# Allegro board Tesis_minimum_size_v2.brd
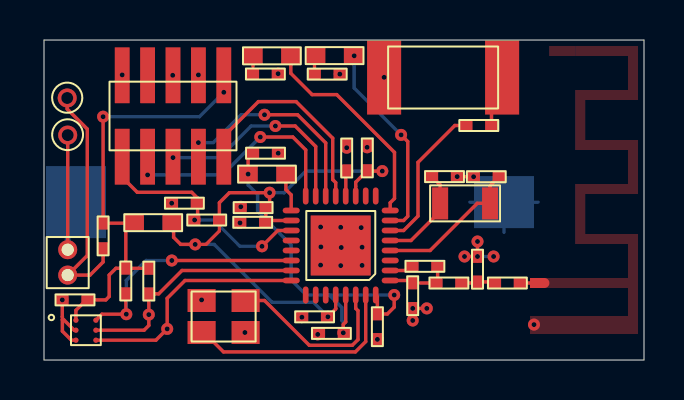
[diagram p0: board, top side]
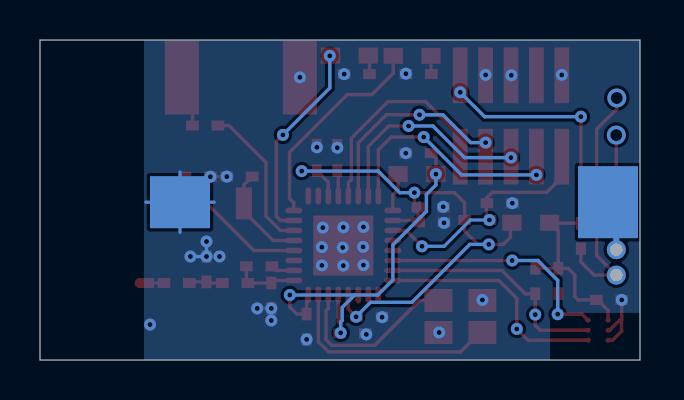
[diagram p1: board, bottom side, seen from below]

Outline 30 x 16 mm; copper layers: TOP, BOTTOM. Coordinates in mm from the lower left corner of the outline.
Outline path: 0,16 0,0 30,0 30,16 0,16

## Design rules (mm)
constraint set DEFAULT: min track width 0.16, pair gap 0.16

## Placement (name value [footprint] x y rotation side)
A1  Anteena  [AN043_FLIP]  24.8 0.8 270 top
C3  12 pF  [MF_0402_SMD_CAPACITOR]  22.12 9.17 0 top
C4  12 pF  [MF_0402_SMD_CAPACITOR]  20.02 9.17 180 top
C5  1.2 pF  [MF_0402_SMD_CAPACITOR]  18.43 3.21 90 top
C6  1.2 pF  [MF_0402_SMD_CAPACITOR]  21.68 4.54 270 top
C7  12 pF  [MF_0402_SMD_CAPACITOR]  23.17 3.85 180 top
C8  100 nF  [MF_0402_SMD_CAPACITOR]  15.13 10.1 270 top
C9  10 uF  [MF_0402_SMD_CAPACITOR]  11.07 10.34 180 top
C10  100 nF  [MF_0402_SMD_CAPACITOR]  14.37 1.33 0 top
C11  100 nF  [MF_0402_SMD_CAPACITOR]  16.67 1.67 90 top
C13  100 nF  [MF_0402_SMD_CAPACITOR]  7.02 7.84 0 top
C17  100 nF  [MF_0402_SMD_CAPACITOR]  16.16 10.11 270 top
C18  100 nF  [MF_0402_SMD_CAPACITOR]  13.53 2.16 0 top
C19  10 uF  [MF_0402_SMD_CAPACITOR]  10.44 6.89 0 top
C20  100 nF  [MF_0402_SMD_CAPACITOR]  10.46 7.62 0 top
C21  100 nF  [MF_0402_SMD_CAPACITOR]  1.55 3.01 0 top
CON1  -  [FTSH-105-01-F-DV]  6.45 12.2 0 top
CON2  -  [M50-3530242]  1.19 4.88 270 top
FL1  BLM18HE152SN1  [MF_0603_SMD_FILTER]  5.46 6.87 0 top
L1  2 nH  [MF_0402_SMD_INDUCTOR]  20.25 3.85 0 top
L2  15 nH  [MF_0402_SMD_INDUCTOR]  19.05 4.69 0 top
L3  10 uH  [MF_0603_SMD_INDUCTOR]  11.15 9.3 180 top
LED1  green led  [MF_0603_SMD_LED]  11.39 15.21 180 top
LED2  red led  [MF_0603_SMD_LED]  14.53 15.22 180 top
R1  100 k  [MF_0402_SMD_RESISTOR]  8.13 7 0 top
R3  10 k  [MF_0402_SMD_RESISTOR]  4.09 3.95 90 top
R4  10 k  [MF_0402_SMD_RESISTOR]  5.24 3.95 90 top
R5  0  [MF_0402_SMD_RESISTOR]  2.96 6.21 90 top
R6  680  [MF_0402_SMD_RESISTOR]  11.07 14.3 0 top
R7  150  [MF_0402_SMD_RESISTOR]  14.16 14.3 0 top
R9  270  [MF_0402_SMD_RESISTOR]  21.74 11.73 0 top
SW2  -  [KSS341GLFS]  19.95 14.12 180 top
U1  CC2650  [SMD_CC2650_32]  14.84 5.73 90 top
U6  -  [HDC2010]  2.1 1.49 0 top
U7  -  [S8421-45R]  14.5 7.89 90 bottom
Y1  32.768kHz  [C-135R]  21.05 7.83 180 top
Y2  24 MHZ  [TSX-3225_24MHZ]  8.98 2.18 0 top

## Library data of the parts
A1 = Anteena
C3-C11 C13 C17-C21 = Capacitor
CON1 = FTSH-105-01-F-DV
CON2 = M50-3530242
FL1 = BLM18HE152SN1
L1-L3 = Inductor
LED1 LED2 = led
R1 R3-R7 R9 = Resistor
SW2 = SwitchButton
U1 = CC2650
U6 = HDC2010
U7 = S8421-45R
Y1 = FC-135R
Y2 = TXS-3225

## Footprints (pads in the part's own frame, mm; a bottom-side part is the same pattern mirrored in y, then rotated)
AN043_FLIP
  rect 0.5x0.5 smd: 1(-3.05,-0.25)
C-135R
  rect 0.8x1.6 smd: 1(-1.25,0) 2(1.25,0)
FTSH-105-01-F-DV
  rect 0.74x2.79 smd: 1(-2.54,2.035) 2(-1.27,2.035) 3(0,2.035) 4(1.27,2.035) 5(2.54,2.035) 6(-2.54,-2.035) 7(-1.27,-2.035) 8(0,-2.035) 9(1.27,-2.035) 10(2.54,-2.035)
HDC2010
  round 0.263 smd: 1(-0.5,0.5) 2(0.5,0.5) 3(-0.5,0) 4(0.5,0) 5(-0.5,-0.5) 6(0.5,-0.5)
KSS341GLFS
  rect 1.7x3.7 smd: 1(-2.95,0) 2(2.95,0)
M50-3530242
  round 0.95 hole 0.6: 1(-0.635,0) 2(0.635,0)
MF_0402_SMD_CAPACITOR
  rect 0.635x0.5 smd: 1(-0.635,0) 2(0.635,0)
MF_0402_SMD_INDUCTOR
  rect 0.635x0.5 smd: 1(-0.635,0) 2(0.635,0)
MF_0402_SMD_RESISTOR
  rect 0.635x0.5 smd: 1(-0.635,0) 2(0.635,0)
MF_0603_SMD_FILTER
  rect 0.965x0.8 smd: 1(-0.945,0) 2(0.945,0)
MF_0603_SMD_INDUCTOR
  rect 0.965x0.8 smd: 1(-0.945,0) 2(0.945,0)
MF_0603_SMD_LED
  rect 0.965x0.8 smd: 1(-0.945,0) 2(0.945,0)
S8421-45R
  rect 2.6x3 smd: 1(0,8.5)
  rect 3.6x3 smd: 2(0,-12.9)
SMD_CC2650_32
  rrect 0.28x0.85 smd: 1(-1.75,-2.475) 2(-1.25,-2.475) 3(-0.75,-2.475) 4(-0.25,-2.475) 5(0.25,-2.475) 6(0.75,-2.475) 7(1.25,-2.475) 8(1.75,-2.475) 17(1.75,2.475) 18(1.25,2.475) 19(0.75,2.475) 20(0.25,2.475) 21(-0.25,2.475) 22(-0.75,2.475) 23(-1.25,2.475) 24(-1.75,2.475)
  rrect 0.85x0.28 smd: 9(2.475,-1.75) 10(2.475,-1.25) 11(2.475,-0.75) 12(2.475,-0.25) 13(2.475,0.25) 14(2.475,0.75) 15(2.475,1.25) 16(2.475,1.75) 25(-2.475,1.75) 26(-2.475,1.25) 27(-2.475,0.75) 28(-2.475,0.25) 29(-2.475,-0.25) 30(-2.475,-0.75) 31(-2.475,-1.25) 32(-2.475,-1.75)
  rect 3x3 smd: 33(0,0)
TSX-3225_24MHZ
  rect 1.4x1.15 smd: 1(-1.1,-0.8) 2(1.1,-0.8) 3(1.1,0.8) 4(-1.1,0.8)

## Nets
GND: A1.1(FEED) C3.1 C4.1 C5.1 C6.1 C7.1 C8.1 C9.1 C10.1 C11.1 C13.1 C17.1 C18.1 C19.1 C20.1 C21.1 CON1.1 CON1.3 CON1.4 R6.2(B) R7.2(B) SW2.2(B) U1.33 U6.3 U6.5 U7.1(B) Y2.2 Y2.4(D)
VDD: C21.2(B) CON1.5 FL1.1 R3.2(B) R4.2(B) R5.2(B) U6.1(VDD)
VDDR: C9.2(B) C10.2(B) C11.2(B) L3.2(B) U1.29 U1.32
VDDS: C17.2(B) C18.2(B) C19.2(B) C20.2(B) FL1.2(B) R1.2(B) U1.11 U1.18 U1.28
DCDC_SW: L3.1 U1.17
DIO_0: R9.1 U1.6
DIO_1: LED2.1 U1.7
DIO_2: LED1.1 U1.8
DIO_3: U1.9
DIO_4: U1.10
DIO_5: CON1.8 U1.15
DIO_6: CON1.7 U1.16
DIO_7: U1.20
DIO_8: U1.21
DIO_9: R3.1 U1.22 U6.2
DIO_10: R4.1 U1.23 U6.4
DIO_11: U1.24 U6.6
DIO_12: U1.25
DIO_13: U1.26
DIO_14: U1.27
JTAG_TCKC: CON1.9 U1.14
JTAG_TMSC: CON1.10 U1.13
RESET_N: C13.2(B) CON1.6 R1.1 U1.19
RF_N: L2.1 U1.2
RF_P: C5.2(B) L1.1 L2.2(B) U1.1
X24M_N: U1.30 Y2.3
X24M_P: U1.31 Y2.1
X32K_Q1: C3.2(B) U1.4 Y1.1
X32K_Q2: C4.2(B) U1.5(X32K_Q2) Y1.2(B)
N04077: C6.2(B) C7.2(B) L1.2(B)
N04548: C8.2(B) U1.12
N48393: LED1.2(B) R6.1
N48455: LED2.2(B) R7.1
N53442: R9.2(B) SW2.1
N63898: CON2.1 U7.2
N65616: CON2.2(B) R5.1

Pads without a net: CON1 2; U1 3

## Via types
v1: diameter 0.95, hole 0.6, TOP to BOTTOM, 2 vias
v2: diameter 0.6, hole 0.25, TOP to BOTTOM, 60 vias

## Routing (per net, layer and track width the routed paths; a pad name or vN(x,y) marks a point on that pad's centre or on a via; arc(x,y) is an arc through that point)
GND: length 16.4
  TOP w0.16: C17.1 16.16,10.73 v2(16.16,10.64) ; v2(20.66,9.17) 20.66,9.17 v2(21.48,9.17) ; R6.2 v2(11.71,14.32) ; R7.2 v2(14.79,14.3) ; 9.8,6.89 v2(9.8,6.86) ; SW2.2 v2(17,14.14)
  TOP w0.17: Y2.2 v2(10.04,1.38) ; CON1.3 v2(6.44,14.24) ; C7.1 A1.1 ; 7.88,2.98 v2(7.88,3.01) ; 0.92,2.01 0.92,1.44 1.37,0.99 U6.5 ; 0.92,2.01 0.99,2.01 1.51,1.49 U6.3 ; 0.92,2.01 0.92,2.16 0.92,2.17 v2(0.92,3.01) ; 3.91,14.24 v2(3.91,14.26) ; v2(21.02,5.18) v2(21.68,5.18) v2(21.68,5.93) ; v2(19.14,2.58) v2(18.43,2.58) v2(18.43,1.98) ; CON1.4 v2(7.72,14.26)
  TOP w0.5: A1.1 25.02,3.85
  BOTTOM w0.16: 23,6.38 U7.1 ; U7.1 21.29,7.89 ; U7.1 23,9.4 ; U7.1 24.71,7.89
  BOTTOM w0.17: v2(21.68,5.93) v2(21.68,5.18) v2(22.48,5.18)
  vias: v2(6.38,7.84) v2(9.84,7.66) v2(11.71,10.34) v2(12.89,2.14) v2(13.69,1.28) v2(13.83,6.65) v2(13.85,5.66) v2(13.83,4.75) v2(14.84,6.64) v2(14.87,5.62) v2(14.84,4.72) v2(15.13,10.62) v2(15.86,6.62) v2(15.9,5.64) v2(15.9,4.73) v2(16.67,1.03) v2(24.5,1.77)
VDD: length 22.3
  TOP w0.16: R3.2 4.74,4.59 4.75,4.58 R4.2
  TOP w0.17: 4.47,6.82 FL1.1 ; 4.47,6.82 4.45,6.84 R5.2 v2(2.96,12.17) ; 4.47,6.82 4.09,6.44 R3.2 3.59,4.59 3.26,4.25 3.26,3.18 3.09,3.01 C21.2 2.12,3.01 1.6,2.48 U6.1 ; 8.98,14.24 8.99,14.24 v2(8.99,13.39)
  BOTTOM w0.17: v2(8.99,13.39) 7.77,12.17 v2(2.96,12.17)
VDDR: length 19.5
  TOP w0.17: v2(10.21,9.3) 10.21,10.11 C9.2 ; v2(17.51,3.25) 17.51,2.64 17.17,2.3 C11.2 16.67,3.17 U1.32 ; v2(14.96,1.36) 14.96,1.78 15.09,1.9 U1.29
  BOTTOM w0.17: 14.27,3.25 14.89,2.62 14.89,1.98 14.96,1.91 v2(14.96,1.36) ; 14.27,3.25 13.11,3.25 12.36,4.01 12.36,5.76 10.68,7.43 10.68,8.28 10.21,8.75 v2(10.21,9.3) ; 14.27,3.25 v2(17.51,3.25)
VDDS: length 28.3
  TOP w0.16: 7.59,5.78 8.1,5.78 8.77,6.45 8.77,7
  TOP w0.17: C19.2 11.16,6.98 11.24,6.98 ; 11.24,6.98 11.09,7.12 C20.2 11.28,7.81 v2(11.28,8.37) 9.27,8.37 8.77,7.87 8.77,7 ; 11.24,6.98 U1.18 ; U1.28 14.59,2.58 14.58,2.58 14.58,2.55 v2(14.2,2.16) ; 7.59,5.78 v2(7.56,5.78) 6.84,5.78 6.48,6.14 6.48,6.79 FL1.2 ; 15.59,8.28 U1.11 15.59,8.68 15.59,8.89 C17.2 16.19,9.45 v2(16.91,9.45)
  BOTTOM w0.17: v2(11.28,8.37) 12.01,8.37 13.09,9.45 v2(16.91,9.45) ; v2(7.56,5.78) 8.51,5.78 11.41,2.89 13.47,2.89 v2(14.2,2.16)
DCDC_SW: length 1.9
  TOP w0.17: L3.1 12.1,8.52 12.36,8.26 12.36,7.48
DIO_0: length 7.5
  TOP w0.17: U1.6 17.98,6.48 18.7,7.2 18.7,9.88 20.54,11.73 R9.1
DIO_1: length 10.1
  TOP w0.17: U1.7 17.98,6.98 18.19,7.18 18.19,10.92 v2(17.86,11.26) ; LED2.1 15.48,15.21 v2(15.51,15.21)
  BOTTOM w0.17: v2(17.86,11.26) 15.51,13.6 v2(15.51,15.21)
DIO_2: length 10.7
  TOP w0.17: LED1.1 12.34,14.33 13.4,13.27 14.63,13.27 17.52,10.38 17.52,8.08 17.31,7.86 U1.8
DIO_5: length 10.8
  TOP w0.16: 6.37,10.17 CON1.8
  TOP w0.17: v2(11.57,11.7) 12.56,11.7 13.59,10.68 U1.15 ; CON1.8 v2(6.45,10.12)
  BOTTOM w0.17: v2(11.57,11.7) 10.36,11.7 8.78,10.12 v2(6.45,10.12)
DIO_6: length 12.2
  TOP w0.17: v2(10.82,11.15) 12.44,11.15 13.09,10.51 U1.16 ; CON1.7 v2(5.18,9.26)
  BOTTOM w0.17: v2(5.18,9.26) 8.92,9.26 v2(10.82,11.15)
DIO_9: length 13
  TOP w0.16: R3.1 4.09,2.32 v2(4.12,2.29)
  TOP w0.17: v2(4.12,2.29) 2.89,2.29 U6.2 ; U1.22 v2(6.39,4.98)
  BOTTOM w0.17: v2(6.39,4.98) 5.11,4.98 4.12,3.99 v2(4.12,2.29)
DIO_10: length 11.9
  TOP w0.17: U1.23 6.9,4.48 5.74,3.31 R4.1 v2(5.24,2.27) 5.24,1.73 5.01,1.49 U6.4
DIO_11: length 11.9
  TOP w0.17: U1.24 7.05,3.98 6.16,3.09 v2(6.16,1.55) 5.6,0.99 U6.6
JTAG_TCKC: length 10.9
  TOP w0.17: U1.14 14.09,10.86 12.68,12.26 v2(11.03,12.26) ; CON1.9 v2(7.72,10.87)
  BOTTOM w0.17: v2(7.72,10.87) 8.46,10.87 9.86,12.26 v2(11.03,12.26)
JTAG_TMSC: length 10.9
  TOP w0.17: U1.13 14.59,8.87 14.44,9.02 14.44,11.09 12.61,12.92 10.72,12.92 8.99,11.19 8.99,10.17
RESET_N: length 12.1
  TOP w0.16: R1.1 v2(7.53,7)
  TOP w0.17: 7.68,7.82 7.68,7.15 v2(7.53,7) ; 7.68,7.82 C13.2 ; 7.68,7.82 7.68,8.09 7.38,8.39 4.67,8.39 3.91,9.14 3.91,10.17 ; U1.19 11.69,6.48 v2(10.9,5.69)
  BOTTOM w0.16: v2(10.9,5.69) 9.79,5.69 8.48,7 v2(7.53,7)
RF_N: length 1.2
  TOP w0.17: U1.2 18.2,4.48 L2.1
RF_P: length 3.2
  TOP w0.17: L2.2 19.68,3.92 L1.1 C5.2 18.31,3.98 U1.1
X24M_N: length 8.9
  TOP w0.17: Y2.3 11.03,2.98 13.27,0.74 15.42,0.74 15.7,1.02 15.7,2.46 15.59,2.58 U1.30
X24M_P: length 11.2
  TOP w0.17: 7.88,1.38 8,1.38 8.97,0.41 15.57,0.41 16.09,0.92 U1.31
X32K_Q1: length 7.5
  TOP w0.17: U1.4 19.3,5.48 21.66,7.83 Y1.1 22.3,8.72 C3.2
X32K_Q2: length 5
  TOP w0.17: C4.2 19.8,8.76 Y1.2 19.8,7.43 18.35,5.98 U1.5
N04077: length 1.7
  TOP w0.17: C7.2 22.48,3.91 C6.2 21.62,3.85 L1.2
N04548: length 1.3
  TOP w0.17: U1.12 15.09,8.21 15.09,9.42 C8.2
N48393: length 0.9
  TOP w0.16: R6.1 10.45,14.32 LED1.2
N48455: length 0.9
  TOP w0.16: R7.1 13.53,15.16 LED2.2
N53442: length 2.6
  TOP w0.17: R9.2 22.38,13.6 SW2.1
N63898: length 8.3
  TOP w0.17: v1(1.19,11.25) CON2.1
  BOTTOM w0.3: U7.2 1.19,7.48 CON2.1
N65616: length 12.4
  TOP w0.17: v1(1.16,13.1) 1.16,12.55 2.17,11.55 2.17,5.23 CON2.2 2.3,4.25 2.96,4.9 R5.1

## Copper pours and planes (outline as drawn; the poured copper is in the pictures)
GND on TOP: 29.7,1.3 24.3,1.3 24.3,2.2 29.2,2.2 29.2,3.6 24.3,3.6 24.3,4.1 29.2,4.1 29.2,5.8 26.56,5.8 26.56,8.8 29.2,8.8 29.2,10.5 26.56,10.5 26.56,13.5 29.2,13.5 29.2,15.2 26.56,15.2 26.56,15.7 29.7,15.7 29.7,13 27.06,13 27.06,11 29.7,11 29.7,8.3 27.06,8.3 27.06,6.3 29.7,6.3
GND on BOTTOM: 4.49,0.01 4.49,2.36 0.01,2.36 0.01,16 24.8,16 24.8,0.01

Small or netless copper shapes (teardrops, artwork), in the pictures only: 1 on TOP
